# EAGLE board ELEKTRA-PMIC v0.2-35X19 Half frame shield (EAGLE 9.6.2)
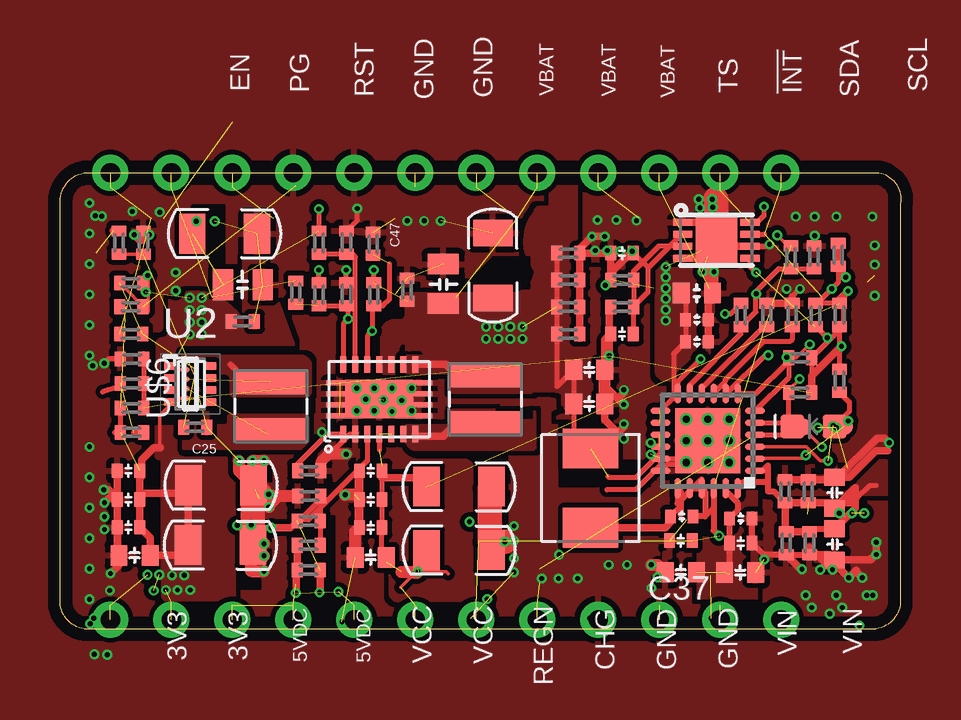
[diagram p0: board, top side]
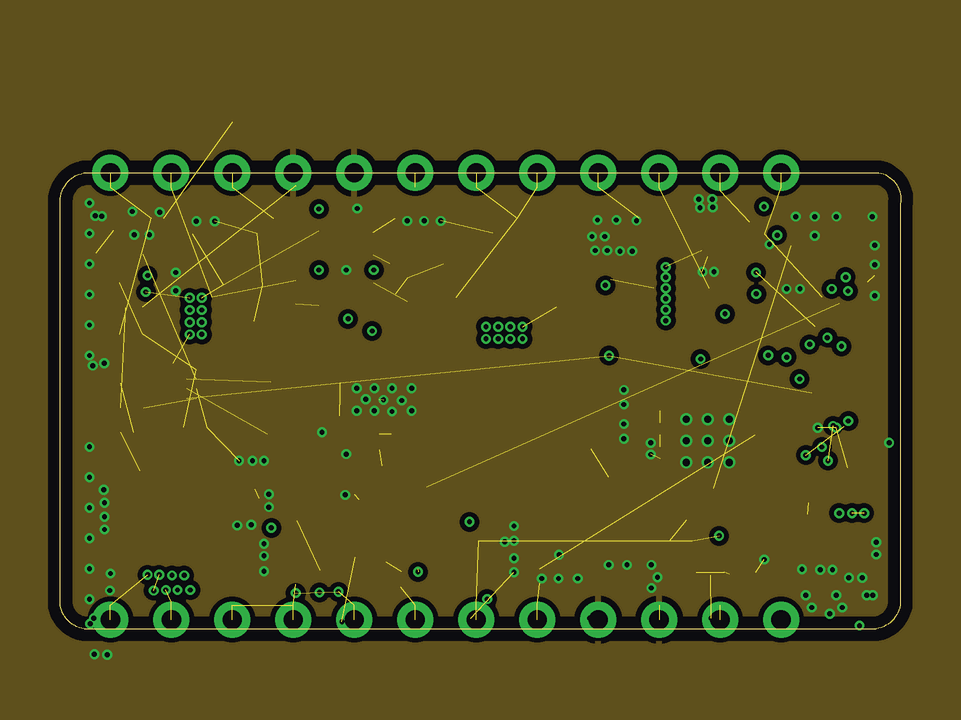
[diagram p1: board, inner layer Route2]
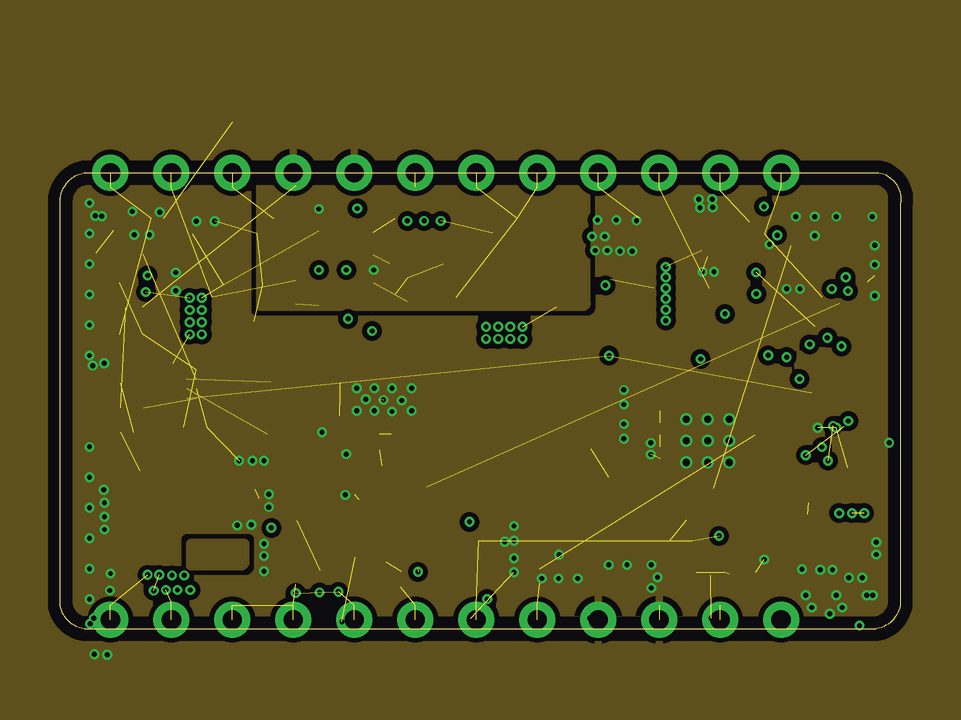
[diagram p2: board, inner layer Route15]
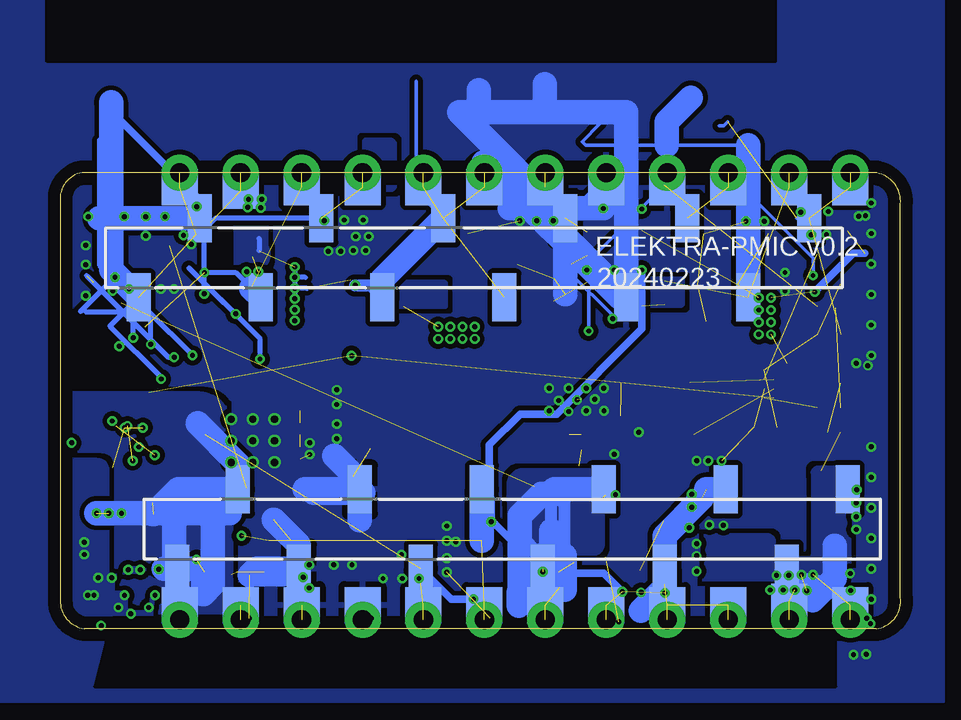
[diagram p3: board, bottom side, seen from below]

Size 35.03 x 19 mm. Coordinates in mm from the lower left corner, seen from the top.
Outline: 1.01,0 34.01,0 arc90 35.01,1.3 35.01,17.7 arc90 34.11,19 1.11,19 arc90 0.01,17.69 0.01,1.3 arc90 1.01,0
Copper layers (1+2*15+16): Top 0.035mm / dielectric 1.5mm / Route2 0.035mm / dielectric 0.15mm / Route15 0.035mm / dielectric 0.2mm / Bottom 0.035mm
Design rules "default *": minimum track width 4mil, minimum drill 8mil, track to track 8mil, track to pad 6mil, pad to pad 6mil, via to via 6mil, smd to smd 6mil, copper to edge 20mil, drill to drill 6mil, minimum pad ring 4mil, minimum via ring 4mil, stop-mask expansion 4mil, vias tented up to drill 16mil, thermal gap 10mil
Net classes: 0 default: width 0.152 mm, drill 0.203 mm, clearance 0.152 mm; 1 power: width 0.254 mm, drill 0.203 mm, clearance 0.203 mm; 3 BAT: drill 0.203 mm, clearance 0.203 mm; 4 3V3: width 0.305 mm, drill 0.203 mm, clearance 0.508 mm; 6 +3V3: width 0.203 mm, drill 0.203 mm, clearance 0.152 mm

## Footprints (pad centres in the part's own frame; a part is rotated, then mirrored left to right if it is on the bottom)
C0402_B = smd 0.457 x 0.61: 1 -0.483,0; 2 0.483,0
C-0402 = smd 0.45 x 0.55: 1 -0.47,0; 2 0.47,0
C0603 = smd 0.7 x 0.85: 1 -0.65,0; 2 0.65,0
C0402 = smd 0.45 x 0.6: 1 -0.47,0; 2 0.47,0
C-0603A = smd 0.7 x 0.85: 1 -0.65,0; 2 0.65,0
C0805 = smd 0.85 x 1.3: 1 -0.8,0; 2 0.85,0
C1206 = smd 1.1 x 1.65: 1 -1.35,0; 2 1.35,0
1X12_SMD_STRAIGHT = smd 1 x 2: 1 13.97,1.65; 2 11.43,-1.65; 3 8.89,1.65; 4 6.35,-1.65; 5 3.81,1.65; 6 1.27,-1.65; 7 -1.27,1.65; 8 -3.81,-1.65; 9 -6.35,1.65; 10 -8.89,-1.65; 11 -11.43,1.65; 12 -13.97,-1.65
LED-0603 = smd 1 x 1: A -0.877,0; C 0.877,0
INDUCTOR-VLS-E = smd 1 x 3: P$1 -1,0; P$2 1,0
INDUCTOR-4040 = smd 1.65 x 2.3: P$1 -1.65,0; P$2 1.65,0
R0402_B = smd 0.457 x 0.61: 1 -0.483,0; 2 0.483,0
TP0.7MM = smd 0.7 x 0.7: P$1 0,0
QFN24 = smd 0.85 x 0.28: 1 -1.975,1.25; 2 -1.975,0.75; 3 -1.975,0.25; 4 -1.975,-0.25; 5 -1.975,-0.75; 6 -1.975,-1.25; 13 1.975,-1.25; 14 1.975,-0.75; 15 1.975,-0.25; 16 1.975,0.25; 17 1.975,0.75; 18 1.975,1.25 | smd 0.28 x 0.85: 7 -1.25,-1.975; 8 -0.75,-1.975; 9 -0.25,-1.975; 10 0.25,-1.975; 11 0.75,-1.975; 12 1.25,-1.975; 19 1.25,1.975; 20 0.75,1.975; 21 0.25,1.975; 22 -0.25,1.975; 23 -0.75,1.975; 24 -1.25,1.975 | smd 2.7 x 2.7: PAD 0,0 | drill 0.3 pad 0.406: PAD@1 -0.9,0.9; PAD@2 0,0.9; PAD@3 0.9,0.9; PAD@4 -0.9,0; PAD@5 0,0; PAD@6 0.9,0; PAD@7 -0.9,-0.9; PAD@8 0,-0.9; PAD@9 0.9,-0.9
SOT538 = smd 0.475 x 0.3: 1 -0.838,0.754; 2 -0.838,0.254; 3 -0.838,-0.246; 4 -0.838,-0.746; 5 0.838,-0.746; 6 0.838,0.254; 7 0.838,-0.246; 8 0.838,0.754
TDFN-8 = smd 0.8 x 0.3: 1 -1.4,0.75; 2 -1.4,0.25; 3 -1.4,-0.25; 4 -1.4,-0.75; 5 1.4,-0.75; 6 1.4,-0.25; 7 1.4,0.25; 8 1.4,0.75 | smd 1.73 x 1.88: EP 0,0
12PIN_2.54 = drill 0.8 pad 1.5: 1 -13.97,0; 2 -11.43,0; 3 -8.89,0; 4 -6.35,0; 5 -3.81,0; 6 -1.27,0; 7 1.27,0; 8 3.81,0; 9 6.35,0; 10 8.89,0; 11 11.43,0; 12 13.97,0 | smd 1.5 x 1.5 bottom: P$1 -13.97,0.6; P$2 -11.43,0.75; P$3 -8.89,0.6; P$4 -6.35,0.6; P$5 -3.81,0.6; P$6 -1.27,0.6; P$7 1.27,0.6; P$8 3.81,0.6; P$9 6.35,0.6; P$10 8.89,0.6; P$11 11.43,0.6; P$12 13.97,0.6
TPS63020 = smd 0.25 x 0.7: 1 -1.5,-1.45; 2 -1,-1.45; 3 -0.5,-1.45; 4 0,-1.45; 5 0.5,-1.45; 6 1,-1.45; 7 1.5,-1.45; 8 1.5,1.45; 9 1,1.45; 10 0.5,1.45; 11 0,1.45; 12 -0.5,1.45; 13 -1,1.45; 14 -1.5,1.45 | smd 1.1 x 0.2: 15 -1.65,0.69; 16 -1.65,0.23; 17 -1.65,-0.23; 18 -1.65,-0.69; 19 1.65,-0.69; 20 1.65,-0.23; 21 1.65,0.23; 22 1.65,0.69 | smd 2.85 x 1.58: 23 0,0
DSBGA = smd 0.23 x 0.23: A1 -0.2,0.6; A2 0.2,0.6; B1 -0.2,0.2; B2 0.2,0.2; C1 -0.2,-0.2; C2 0.2,-0.2; D1 -0.2,-0.6; D2 0.2,-0.6

## Placement (x,y rotation side)
C1  100pF  [C0402_B]  21.18,14.53 180 top
C2  47nF  [C-0402]  25.91,4.67 180 top
C3  10uF  [C0603]  26.54,13.98 0 top
C4  1000pF  [C0402_B]  21.18,13.4 180 top
C5  10nF  [C0402]  23.42,12.28 180 top
C6  1uF  [C0402]  23.42,15.64 180 top
C7  10uF,25V  [C-0603A]  28.34,2.34 0 top
C8  0.1nF  [C0402_B]  21.18,12.28 180 top
C9  0.1nF  [C0402_B]  31.18,5.73 270 top
C10  100pF  [C0402_B]  30.21,5.73 270 top
C11  1000pF  [C0402_B]  30.26,3.56 90 top
C12  22uF 10V  [C0805]  7.6,14.33 0 top
C13  100nF  [C0402_B]  7.62,12.8 180 top
C14  NC  [C0402_B]  3,9.2 180 top
C15  100uF  [C1206]  6.71,5.97 0 top
C16  22uF  [C-0603A]  3.11,3.05 180 top
C17  0.1uF  [C0402]  28.36,3.56 180 top
C18  100pF  [C0402]  2.85,5.37 180 top
C19  1nF  [C0402]  2.85,6.58 180 top
C20  2.2uF  [C0402_B]  31.23,3.56 90 top
C21  10pF  [C0402_B]  21.18,15.64 180 top
C22  100uF 10V  [C1206]  6.86,16.46 0 top
C23  100uF  [C1206]  6.69,3.48 0 top
C24  0.1uF  [C0402]  2.85,4.22 180 top
C25  10nF  [C0402_B]  5.63,8.39 180 top
C26  22uF 10V  [C0805]  15.97,14.34 90 top
C27  100nF  [C0402_B]  14.46,14.11 270 top
C28  NC  [C0402_B]  10.36,3.47 180 top
C29  100uF  [C1206]  16.63,3.27 0 top
C30  22uF  [C-0603A]  12.95,2.97 180 top
C31  1nF  [C0402]  12.95,6.58 180 top
C32  100pF  [C0402]  12.95,5.37 180 top
C33  100uF 10V  [C1206]  18.04,15.13 90 top
C34  100uF  [C1206]  16.63,5.92 0 top
C35  0.1uF  [C0402]  12.95,4.21 180 top
C36  100nF  [C0402_B]  10.39,6.58 180 top
C37  4.7uF  [C0402]  25.87,3.67 180 top
C47  100nF  [C0402_B]  13.05,16.03 270 top
C49  10uF,25V  [C-0603A]  25.87,2.35 180 top
C57  10uF  [C-0603A]  32.28,3.51 270 top
C58  10uF  [C-0603A]  22.05,9.36 0 top
C59  10uF  [C-0603A]  22.05,10.79 0 top
C64  10uF  [C-0603A]  32.28,5.66 90 top
C72  0.1uF  [C-0402]  26.54,11.96 0 top
C73  1000pF  [C-0402]  26.54,12.88 0 top
C74  1000p  [C-0402]  28.36,4.59 180 top
CONN1  CON1  [1X12_SMD_STRAIGHT]  17.78,15.45 180 bottom
CONN2  CON2  [1X12_SMD_STRAIGHT]  16.18,4.15 180 bottom
D5  yellow  [LED-0603]  31.39,8.43 180 top
L1  2.2uH  [INDUCTOR-VLS-E]  8.79,9.27 270 top
L3  2.2uH  [INDUCTOR-VLS-E]  17.72,9.55 270 top
L7  2.2uH  [INDUCTOR-4040]  22.11,5.85 90 top
R1  0R  [R0402_B]  28.37,13.07 270 top
R2  10K  [R0402_B]  31.47,13.07 270 top
R3  10K  [R0402_B]  32.43,15.58 270 top
R4  1.1M  [R0402_B]  10.36,2.44 180 top
R5  180K  [R0402_B]  10.39,5.53 0 top
R6  62K  [R0402_B]  10.36,4.49 180 top
R7  150  [R0402_B]  23.42,13.4 0 top
R8  1M  [R0402_B]  3,8.18 180 top
R9  180K  [R0402_B]  3,11.24 0 top
R10  10K  [R0402_B]  30.51,13.07 270 top
R11  0R  [R0402_B]  32.48,13.07 90 top
R14  1M  [R0402_B]  2.96,14.41 180 top
R16  1M  [R0402_B]  2.46,16.09 270 top
R17  24K  [R0402_B]  3,10.22 180 top
R18  NC  [R0402_B]  3.47,16.09 90 top
R19  1M/NC  [R0402_B]  10.79,13.93 270 top
R20  0R/NC  [R0402_B]  11.93,13.93 90 top
R21  1M  [R0402_B]  13.07,13.93 270 top
R23  1M  [R0402_B]  10.79,16.09 270 top
R24  NC  [R0402_B]  11.93,16.09 90 top
R26  0R  [R0402_B]  9.82,14 90 top
R27  0R  [R0402_B]  2.96,12.28 180 top
R28  0R  [R0402_B]  2.96,13.41 180 top
R30  4K7  [R0402_B]  30.84,9.84 180 top
R33  160R  [R0402_B]  29.45,13.07 90 top
R34  31.2K  [R0402_B]  31.42,15.48 90 top
R35  5.49K  [R0402_B]  30.46,15.48 270 top
R36  4K7  [R0402_B]  30.84,11.29 180 top
R44  1K  [R0402_B]  32.48,10.33 90 top
R54  1K  [R0402_B]  23.42,14.53 0 top
TP1  TP  [TP0.7MM]  30.95,8.4 180 top
TP2  TP  [TP0.7MM]  32.68,8.42 180 top
U1  BQ24195L  [QFN24]  26.99,7.82 180 top
U2  TPS631000DRLR  [SOT538]  5.43,10.19 0 top
U4  MAX1704X  [TDFN-8]  27.35,16.19 0 top
U$1  12PIN_2.54  [12PIN_2.54]  16.07,0.38 0 top
U$3  TPS63020  [TPS63020]  13.3,9.56 0 top
U$4  12PIN_2.54  [12PIN_2.54]  16.07,19 180 top
U$6  TPS631010  [DSBGA]  5.48,10.19 0 top

## Library data of the parts
C1 = Particle; ITEM_NAME: CAP CER 100pF 50V X7R 0402 10%; ITEM_NUMBER: PT-200138
C2 = particle SZ; ITEM_NAME: CAP CER 0.1uF 16V X7R 0402 10%; ITEM_NUMBER: PT-200005
C3 C37 C58 C59 = particle SZ; ITEM_NAME: CAP CER 10uF 6.3V X5R 0603 10% Low ESR<70mohms; ITEM_NUMBER: PT-200209
C4 = Particle; ITEM_NAME: CAP CER 1000PF 50V X7R 0402 10%
C5 = particle SZ; ITEM_NAME: CAP CER 10nF 16V X5R 0402 10%; ITEM_NUMBER: PT-200136
C6 = particle SZ; ITEM_NAME: CAP CER X5R 1uF 0402 10V ±10% ROHS; ITEM_NUMBER: PT-200695
C7 C49 C57 C64 = particle SZ; ITEM_NAME: CAP CER 100PF 50V C0G/NP0 0603 5%; ITEM_NUMBER: PT-200458
C8 C13 C27 = Particle; ITEM_NAME: CAP CER 0.1UF 16V X7R 0402 10%; ITEM_NUMBER: PT-200649
C9 = Particle; ITEM_NAME: CAP CER 0.1UF 25V X7R 0402 20%; ITEM_NUMBER: PT-200690
C10 = Particle; ITEM_NAME: CAP CER 100PF 1% 50V C0G/NP0 0402; ITEM_NUMBER: 120-00051
C11 = Particle; ITEM_NAME: CAP CER 1000PF 50V X7R 0402 10%; ITEM_NUMBER: PT-200631
C12 C26 = particle SZ; ITEM_NAME: CAP CER 0.1UF 16V X7R 0402 10%; ITEM_NUMBER: 120-00060
C14 C25 C28 C36 C47 L1 L3 R7 R33 = Particle
C15 C23 C29 C34 = particle SZ; ITEM_NAME: 100UF 20% 6.3V 1206, Low DCL, ESR 0.5Ohm; ITEM_NUMBER: 120-00011
C16 C30 = particle SZ; ITEM_NAME: CAP CER 22UF 10V X5R 0603 20%; ITEM_NUMBER: 120-00061
C17 = RedBear; ITEM_NAME: CAP CER 0.1UF 25V X7R 0402 20%; ITEM_NUMBER: PT-200690
C18 C32 = particle SZ; ITEM_NAME: 100pF 50V X7R 0402 10%; ITEM_NUMBER: PT-200138
C19 C31 C73 = particle SZ; ITEM_NAME: 1000PF 50V X7R 0402 10%; ITEM_NUMBER: PT-200631
C20 = Particle; ITEM_NAME: CAP CER 2.2UF 25V X7S 0603; ITEM_NUMBER: PT-201241
C21 = Particle; ITEM_NAME: CAP CER 10PF 5% 50V C0G/NP0 0402; ITEM_NUMBER: 120-00038
C22 C33 U2 U$1 U$3 U$4 U$6 = particle SZ
C24 C35 = particle SZ; ITEM_NAME: 0.1UF 16V X7R 0402 10%; ITEM_NUMBER: PT-200649
C72 = particle SZ; ITEM_NAME: CAP CER 0.1UF 16V X7R 0402 10%; ITEM_NUMBER: PT-200649
C74 = particle SZ; ITEM_NAME: CAP CER 1000PF 50V X7R 0402 10%; ITEM_NUMBER: PT-200631
CONN1 CONN2 = particle-studios
D5 = SparkFun-LED; PROD_ID: DIO-00819
L7 = Particle; ITEM_NAME: FIXED IND 1UH 5.8A 26 MOHM SMD 4020; ITEM_NUMBER: 155-00005
R1 R26 = Spark; ITEM_NAME: RES SMD 0R OHM 5% 1/16W 0402; ITEM_NUMBER: PT-200624
R2 R3 R10 = Spark; ITEM_NAME: 10K OHM 5% 1/16W 0402; ITEM_NUMBER: PT-200004
R4-R6 R9 R18-R20 R24 R27 R28 R34 R35 = Spark
R8 R14 R16 R21 R23 = Spark; ITEM_NAME: RES SMD 1M OHM 1% 1/16W 0402; ITEM_NUMBER: PT-201084
R11 = Particle; ITEM_NAME: RES SMD 0R OHM 5% 1/16W 0402; ITEM_NUMBER: PT-200624
R17 = Spark; ITEM_NAME: RES SMD 24K OHM 1% 1/16W 0402; ITEM_NUMBER: PT-201025
R30 R36 = Particle; ITEM_NAME: RES SMD 4K7 OHM 5% 1/16W 0402; ITEM_NUMBER: PT-200230
R44 R54 = Particle; ITEM_NAME: RES SMD 1K OHM 5% 1/16W 0402; ITEM_NUMBER: PT-200002
TP1 TP2 = Asset Tracker SoM v1.0b
U1 = electron; ITEM_NAME: IC BATT CHG LI-ION 1CELL 24VQFN 2.5A CHG CURRENT; ITEM_NUMBER: 150-00013
U4 = SparkFun-PowerIC; ITEM_NAME: IC 2-WIRE FG MODEL GAUGE LO BATT; ITEM_NUMBER: PT-200141

## Nets
3V3: C14.2 C15.1 C16.1 C18.1 C19.1 C23.1 C24.1 CONN2.11 CONN2.12 R2.1 R3.1 R7.1 R8.2 R28.2 R30.1 R36.1 U$1.1 U$1.2 U$1.P$1 U$1.P$2 U$6.D1
5VDC: CONN2.9 CONN2.10 U$1.3 U$1.4 U$1.P$3 U$1.P$4
!CE: R10.2 U1.9
!FUEL-INT: CONN1.3 R2.2 U1.7 U4.5 U$4.3 U$4.P$3
!RST: CONN1.10 U$4.10 U$4.P$10
BTST: C2.1 U1.21
CHG: CONN2.5 D5.C U1.4 U$1.8 U$1.P$8
ENABLE: CONN1.12 R27.2 U$4.12 U$4.P$12
GND: C1.1 C3.2 C4.1 C5.2 C6.2 C7.2 C8.1 C9.1 C10.1 C11.1 C12.2 C13.1 C15.2 C16.2 C17.1 C18.2 C19.2 C20.1 C21.1 C22.2 C23.2 C24.2 C25.1 C26.2 C27.1 C29.2 C30.2 C31.2 C32.2 C33.2 C34.2 C35.2 C36.1 C37.2 C47.1 C49.2 C57.2 C58.2 C59.2 C64.2 C72.2 C73.2 C74.1 CONN1.8 CONN1.9 CONN2.3 CONN2.4 R5.1 R9.1 R10.1 R18.2 R20.2 R24.2 R33.2 R34.2 U1.17 U1.18 U1.PAD U1.PAD@1 U1.PAD@2 U1.PAD@3 U1.PAD@4 U1.PAD@5 U1.PAD@6 U1.PAD@7 U1.PAD@8 U1.PAD@9 U4.1 U4.4 U4.6 U4.EP U$1.9 U$1.10 U$1.P$9 U$1.P$10 U$3.2 U$3.15 U$3.16 U$3.17 U$3.18 U$3.19 U$3.20 U$3.21 U$3.22 U$3.23 U$4.8 U$4.9 U$4.P$8 U$4.P$9 U$6.C2
ILIM: R33.1 U1.10
N$1: R1.1 U1.12
N$2: R11.1 R44.2
N$3: D5.A R44.1
N$4: TP1.P$1 U1.3
N$5: C14.1 R9.2 R17.1 U$6.D2
N$6: C28.1 R5.2 R6.1 U$3.3
N$7: TP2.P$1 U1.2
N$8: R8.1 R17.2
N$9: R4.1 R6.2
N$11: L3.P$1 U$3.8 U$3.9
N$12: L1.P$1 U$6.B1
N$14: C25.2 R14.2 R27.1 U$6.A2
N$15: R16.2 R18.1 U$6.B2
N$16: L3.P$2 U$3.6 U$3.7
N$17: L1.P$2 U$6.C1
N$19: C36.2 U$3.1
N$20: R19.2 R20.1 R26.1 U$3.14
N$21: C47.2 R21.2 R28.1 U$3.12
N$22: R23.2 R24.1 U$3.13
N$48: C5.1 R7.2 U4.3
N$49: C6.1 R54.2 U4.2
OTG: R3.2 U1.8
PG: CONN1.11 R26.2 U$4.11 U$4.P$11
PMID: C7.1 C17.2 C49.1 C74.2 U1.23
REGN: C37.1 CONN2.6 R35.1 U1.22 U$1.7 U$1.P$7
SCL: CONN1.1 R30.2 U1.5 U4.7 U$4.1 U$4.P$1
SDA: CONN1.2 R36.2 U1.6 U4.8 U$4.2 U$4.P$2
SW1: C2.2 L7.P$1 U1.19 U1.20
TS: CONN1.4 R1.2 R34.1 R35.2 U1.11 U$4.4 U$4.P$4
VBAT: C3.1 C72.1 C73.1 CONN1.5 CONN1.6 CONN1.7 R54.1 U1.13 U1.14 U$4.5 U$4.6 U$4.7 U$4.P$5 U$4.P$6 U$4.P$7
VCC: C28.2 C29.1 C30.1 C31.1 C32.1 C34.1 C35.1 CONN2.7 CONN2.8 R4.2 R11.2 R19.1 U$1.5 U$1.6 U$1.P$5 U$1.P$6 U$3.4 U$3.5
VIN: C9.2 C10.2 C11.2 C20.2 C57.1 C64.1 CONN2.1 CONN2.2 U1.1 U1.24 U$1.11 U$1.12 U$1.P$11 U$1.P$12
VSYS: C1.2 C4.2 C8.2 C12.1 C13.2 C21.2 C22.1 C26.1 C27.2 C33.1 C58.1 C59.1 L7.P$2 R14.1 R16.1 R21.1 R23.1 U1.15 U1.16 U$3.10 U$3.11 U$6.A1

## Tracks (layer width: path | path; a pad name or v marks a point on that pad's centre or on a via)
3.9V
  pour Top (no thermals): 13.38,8.47 14.04,8.47 arc-90 14.12,8.39 14.12,7.83 arc90 14.9,7.04 16.78,7.04 arc-90 17.24,6.59 17.24,1.26 arc-90 17.19,1.2 arc-90 17.14,1.15 14.09,1.15 arc-90 13.76,1.48 13.76,6.89 13.58,7.07 arc90 13.58,7.09 arc-90 13.38,7.3
3V3  (via drill 0.2 pad 0.41)  (9 unrouted)
  Top 0.152: 2.73,13.36 R28.2 | U$6.D1 4.85,9.59 4.16,8.9 4.16,7.55 4.17,7.54
  Top 0.203: C14.2 R8.2 2.26,8.18 | R30.1 R36.1 32.66,12.62 32.66,13.39 32.5,13.55 R2.1 31.55,13.55 v32.15,14.15 32.44,14.44 32.44,16.08 R3.1
  Top 0.305: 3.32,5.65 C18.1 C24.1 3.76,3.79 C16.1 4.9,3.05 C23.1 5.33,5.95 C15.1 5.03,5.65 3.32,5.65 | 3.32,5.65 3.32,6.28 | 3.32,6.28 C19.1 | 3.32,6.28 3.4,6.36 3.4,7.04 3.9,7.54 4.17,7.54 | R7.1 22.88,13.34 v22.88,11.37 | v32.56,11.76 31.33,10.53 R30.1
  Bottom 1.016: CONN2.11 4.75,1.82 3.66,1.82 3.66,1.19 2.75,2.1 2.75,3.45
  other vias: 5.43,1.61 4.9,1.61 4.41,1.61 3.9,1.59 4.13,2.24 4.67,2.22 5.17,2.22 3.65,2.24
  pour Top (no thermals): 4.06,8.44 4.77,8.44 arc-90 4.82,8.39 4.82,7.47 arc90 5.17,7.12 6.8,7.12 arc-90 7.26,6.66 7.26,1.18 4.46,1.18 arc-90 4.29,1.36 4.29,2.24 arc-90 4.26,2.27 4.26,6.94 arc90 4.11,7.09 arc-90 4.01,7.2 4.01,8.39 arc-90
  pour Route15: 5.45,2.49 7.55,2.49 arc90 7.83,2.77 7.83,3.53 arc90 7.68,3.68 5.47,3.68 arc90 5.29,3.5 5.29,2.64 arc90
  pour Bottom (no thermals): 2.47,6.73 3.44,6.73 arc-90 3.69,6.48 3.69,3.1 arc90 3.85,2.95 4.99,2.95 arc90 5.24,3.2 5.24,3.61 arc-90 5.55,3.91 8.27,3.91 arc-90 8.7,3.48 8.7,2.39 arc-90 8.34,2.03 2.25,2.03 arc-90 2.1,2.18 2.1,6.35 arc-90
5VDC  (5 unrouted)
  Bottom 1.016: CONN2.9 9.83,1.84 | CONN2.9 9.83,1.73 10.82,0.74 | CONN2.9 9.83,3.87 8.28,5.42 | CONN2.10 8.11,5.8
!CE
  Top 0.203: U1.9 27.72,10.28 27.72,10.38 29.32,11.97 30.44,11.97 30.51,12.04 R10.2
!FUEL-INT  (via drill 0.2 pad 0.41)  (4 unrouted)
  Top 0.203: U1.7 29.02,9.8 30.27,11.05 v30.27,11.31 | R2.2 31.51,12.58 v31.98,12.12 | U4.5 28.75,15.1 v29,14.84
  Bottom 0.203: v31.98,12.12 31.98,12.76 33.64,14.43 | v30.27,11.31 30.52,11.31 33.92,14.7 | v29,14.84 27.71,14.84 CONN1.3
  Bottom 1.016: CONN1.3 27.05,14.18
!RST  (2 unrouted)
BTST
  Top 0.254: U1.21 26.88,5.71 26.88,4.68 | C2.1 26.87,4.67 27.24,5.04
CHG  (via drill 0.2 pad 0.41)  (3 unrouted)
  Top 0.152: v31.75,7.57 30.89,8.43 D5.C
  Top 0.203: U1.4 30.16,8.07 D5.C
  Bottom 0.305: CONN2.5 18.72,1.23 v17.8,1.23
  Bottom 1.016: 19.99,1.88 CONN2.5
ENABLE  (4 unrouted)
  Bottom 0.152: 7.55,20.95 7.36,20.95 7.2,21.12 | 4.32,17.1 CONN1.12
GND  (via drill 0.2 pad 0.41)  (24 unrouted)
  Top 0.152: C10.1 | C74.1 28.83,3.64 29.34,3.13 v29.34,2.88 | U$3.21 13.76,9.79 13.53,9.56 U$3.23 13.45,9.56 14.14,10.25 U$3.22 | U$3.17 12.39,9.33 12.44,9.38 12.44,9.94 v12.36,10.02 13.05,10.02 13.27,9.79 | U$3.20 14.42,9.33 v14.24,9.51 | U$3.19 14.01,8.87 v13.83,9.05
  Top 0.203: R20.2 v11.93,14.94 | U$3.2 12.08,8.11 10.87,6.9 | 10.87,6.95 10.87,6.9 | 10.87,6.9 C36.1 | 12.45,4.19 C35.2 C32.2 12.48,5.59 | 12.48,6.46 C31.2 | 21.67,14.5 C1.1 | 27.19,13.75 C3.2 | U1.17 26.49,7.07 26.24,6.82 25.26,6.82 U1.18 | 30.51,13.83 v30.83,14.15 | R34.2 31.42,16.27 31.45,16.29 v31.45,16.37 | R24.2 12.39,17.02 v12.39,17.51 | v1.85,11.06 2.03,11.24 R9.1 | U4.6 29.56,15.94 v29.56,16.01 | 7.96,3.41 C23.2
  Top 0.254: C74.1 C17.1 29.32,3.07 C11.1 C20.1
  Top 0.305: 32.83,6.71 32.33,6.21 | 32.33,6.21 32.28,6.15 C64.2 | 32.33,6.21 C9.1 C10.1 | 25.09,2.22 C49.2 | C19.2 C18.2 | C18.2 C24.2 2.38,3.13 C16.2 2.46,2.65 v2.11,2.3 | C5.2 22.7,12.03 C59.2 22.7,10.13 23.25,9.59 | C57.2 32.06,3.07 C20.1 31.23,3.4 31.93,2.7 | 34.49,7.41 33.99,7.41 32.89,6.31 C64.2 | C64.2 32.41,6.31 34.04,7.94 34.34,7.94 v34.54,7.74 | C57.2 33.73,2.86 | v34.01,3.09 33.96,3.09 33.73,2.86 | 33.73,2.86 33.79,2.86 v34.01,3.08 v34.01,3.6 | C57.2 32.28,2.71 v32.87,2.12 33.18,2.43 33.18,2.37 v33.43,2.12 | R18.2 3.47,16.29 | v3.09,16.42 3.35,16.16 3.47,16.29 | 3.47,16.29 3.6,16.42 v3.73,16.42 | C18.2 2.31,5.45 2.05,5.45 v1.85,5.25 | C18.2 2.38,5.43 2.03,5.78 v1.83,5.78 | 31.93,2.7 v31.68,2.45 | 31.93,2.7 v32.18,2.45 v32.19,2.45 | v30.92,2.48 30.86,2.48 C11.1 | v23.84,15.73 23.55,15.44 | 23.55,15.44 22.95,14.84 C6.2 C21.1 | 23.55,15.44 23.34,15.65 v23.34,15.73 | C21.1 21.67,15.84 v22.17,16.34 v22.7,16.34 | C8.1 C4.1 21.67,14.5 | C1.1 C21.1 | C17.1 28.83,3.64 | 23.25,9.59 v23.5,9.34 | 23.25,9.59 23.5,9.84 v23.5,9.95 | C58.2 22.7,8.71 23.25,8.16 | 23.25,8.16 v23.5,7.91 | 23.25,8.16 23.5,8.41 v23.5,8.52 | C72.2 C73.2 27.01,13.57 27.19,13.75 | C3.2 27.19,14.45 v26.77,14.87 | 30.51,13.83 R10.1 R33.2 | C31.2 12.48,5.59 | U4.6 27.6,15.94 U4.EP | U4.4 26.93,15.44 27,15.5 | U4.1 27.21,16.94 27.35,16.8
  Top 0.381: C35.2 12.48,5.59 12.48,6.46
  Top 0.457: v11.93,7.27 11.19,7.27 10.87,6.95
  Top 0.508: C34.2 17.98,5.21 | v24.64,2.65 24.89,2.65 25.2,2.35 C49.2 25.11,2.35 | 12.28,5.57 v11.88,5.57 | C30.2 12.3,4.03 12.45,4.19 | R5.1 8.78,5.53 | 8.78,5.53 8.93,5.37 8.79,5.24 C15.2 | 8.78,5.53 v8.7,5.6 8.33,5.97 C15.2 | 8.7,5.15 v8.7,5.06 | C15.2 7.46,6.57 v7.46,6.99 | C15.2 8.06,6.95 v8.02,6.99 v8.5,6.99 | v8.5,3.03 8.49,3.03 C23.2 8.09,3.54 v8.5,3.54 | v8.5,2.4 7.96,2.4 7.96,3.41 | C58.2 C59.2 | U4.EP 27.19,16.02 C3.2
  Top 0.635: 17.98,5.21 C29.2
  Top 1.016: v18.53,3.62 17.9,3.62 17.9,5.84 C34.2 | C15.2 8.03,5.95 C23.2 | U4.EP 27.35,16.8 27.35,17.9 27.33,17.92
  Bottom 1.016: 14.82,22.68 14.82,21.51 | CONN1.9 11.43,21.51 14.82,21.51 | 22.53,4.53 CONN2.4 | CONN2.4 24.84,5.8 | 22.43,5.62 22.39,5.66 24.45,5.66 | CONN2.4 22.53,6.14 23.61,7.21 | CONN1.8 13.97,13.94 | CONN1.8 18.38,21.51 14.82,21.51 | CONN1.8 14.03,17.04 | 17.45,21.54 17.59,21.54 17.59,22.43 | 15.81,17.98 16.28,17.51 v12.39,17.51 | CONN1.9 15.71,18.08 | 17.36,19.43 11.73,13.8 CONN1.9 | 25.07,2.21 CONN2.3 | 25.78,2.33 25.71,2.26 26.96,2.26 | CONN2.3 26.85,2.5 27.11,2.23 | CONN2.3 25.07,3.5 26.12,4.54
  other vias: 13.1,10.02 13.83,10.02 14.65,10.02 12.74,9.56 13.48,9.53 12.36,9.08 13.1,9.08 14.65,9.08 1.23,17.73 1.47,17.21 1.75,17.18 3.02,17.38 4.16,17.36 1.23,16.46 1.23,15.19 1.23,13.92 1.23,12.65 1.23,11.38 1.23,7.57 1.23,6.3 1.23,5.03 1.23,3.76 1.23,2.49 1.23,1.22 31.07,1.39 32.34,1.39 33.61,1.39 1.26,0.21 1.43,-1.07 1.97,-1.09 31.32,0.88 32.07,0.62 32.59,0.88 33.86,1.39 33.31,0.13 22.4,17.03 1.41,0.43 11.75,0.28 17.11,0.43 22.06,0.43 27.14,0.43 4.82,14.08 4.82,14.84 7.97,4.33 5.68,16.98 6.44,16.98 1.36,10.96 24.62,7.74 24.62,7.26 24.9,2.14 24.64,1.69 22.86,2.65 32.34,8.37 20.8,3.08 23.62,2.65 31.58,8.37 7.38,4.3 10.92,8.19 18.91,4.27 18.91,3.67 18.91,2.93 18.91,2.34 2.08,1.59 22.8,15.76 22.29,15.76 23.18,17.03 24.02,17 27.25,14.87 30.27,14.16 26.67,17.53 27.2,17.56 26.62,17.89 27.18,17.89 1.85,4.66 1.85,4.13 20.07,2.09 20.77,2.09 21.57,2.09 14.47,16.99 15.17,16.99 15.87,16.99 30.65,17.17 31.45,17.17 32.35,17.17 33.85,17.17 33.95,15.97 33.95,15.17 33.95,13.87
  pour Bottom (rank 3): -1.79,27.84 47.33,27.84 47.33,-3.05 -1.79,-3.05
  pour Top (rank 3): -4.79,30.07 42.48,30.07 42.48,-5.31 -4.79,-5.31
  pour Route2: -3.82,29.13 44.18,29.13 44.18,-4.73 -3.82,-4.73
  cutout Top: 20.82,7 24.56,7 24.56,5.93 20.82,5.93
  cutout Top: 19.65,9.25 19.65,8.8 16.35,8.8
  cutout Top: 6.95,9.58 10.58,9.58 10.58,9.02 6.95,9.02
  cutout Top: 7.38,7.17 8.35,7.17 8.35,1.66 7.38,1.66
  cutout Top: 17.37,7.12 18.64,7.12 18.64,2.04 17.37,2.04
  cutout Bottom: 20.61,18.44 20.91,18.44 20.91,18.11 20.61,18.11
  cutout Top: 15.59,14.54 17.09,14.54 18.03,15.48 19.55,15.48 19.55,14.18 15.59,14.18
  pour Route15 (rank 3): -2.99,28.47 45.73,28.47 45.73,-3.94 -2.99,-3.94
  cutout Top: 6.24,13.77 6.24,15.27 5.48,16.03 5.48,17.58 5.53,17.64 6.85,17.64 6.85,13.8 6.83,13.77
  cutout Top: 10.43,14.18 10.43,13.75 11.09,13.75 11.09,14.18
  cutout Top: 10.89,4.68 10.89,1.02 11.42,1.02 11.42,4.68
  cutout Bottom: 2.7,0.46 32.83,0.46 32.85,0.43 33.59,-2.41 32.85,-2.41 2.7,-2.41
  cutout Bottom: 5.22,26.57 5.22,23.62 35.57,23.62 35.57,26.57
ILIM
  Top 0.203: U1.10 26.74,10.01 29.3,12.57 29.45,12.57 R33.1
N$1  (via drill 0.2 pad 0.41)
  Top 0.203: v26.69,11.23 25.74,10.28 U1.12 | R1.1 27.94,13.11 v27.71,13.11
  Bottom 0.203: 28.97,14.35 27.73,13.11 v27.71,13.11 | 29.65,15.04 26.69,12.08 v26.69,11.23
N$2
  Top 0.203: R11.1 R44.2
N$3
  Top 0.203: R44.1 32.89,9.44 32.89,9.05 D5.A
N$4  (via drill 0.2 pad 0.41)  (1 unrouted)
  Top 0.152: TP1.P$1 32.16,8.4 v32.21,8.45 | v32,7 31.68,7 31.1,7.57 U1.3
N$5  (1 unrouted)
  Top 0.203: 3.48,11.46 R9.2 R17.1 C14.1
N$6
  Top 0.203: U$3.3 12.8,6.99 10.35,4.54 10.02,4.54 10.87,5.38 R5.2 10.84,5.5 R6.1 C28.1
N$7  (via drill 0.2 pad 0.41)  (1 unrouted)
  Top 0.152: U1.2 28.99,7.1 30.95,7.1 v31.07,7.22 | v32.85,8.65 32.68,8.48 TP2.P$1
N$8  (1 unrouted)
  Top 0.203: R8.1 3.06,8.18 | R17.2 2.36,10.07 1.77,9.87
N$9  (via drill 0.2 pad 0.41)  (1 unrouted)
  Top 0.203: R6.2 9.58,4.2
  Top 0.305: 9.58,4.2 v8.81,4.2 | R4.1 10.84,1.54 v10.81,1.51
N$11
  Top 0.305: L3.P$1 16.53,10.55 16.07,11.01 U$3.8
  pour Top (no thermals): 14.5,11.36 19.58,11.36 arc-90 19.73,11.21 19.73,9.99 arc-90 19.58,9.84 16.43,9.84 arc-90 16.27,9.99 16.27,10.55 arc90 16.17,10.65 14.5,10.65 arc-90 14.45,10.7 14.45,11.31 arc-90
N$12  (1 unrouted)
  Top 0.254: L1.P$1 7.84,10.27 7.1,11.01
  pour Top (no thermals): 5.1,11.36 10.03,11.36 arc-90 10.43,10.95 10.43,9.89 arc-90 10.23,9.68 7.23,9.68 arc-90 7.13,9.79 7.13,10.4 arc90 6.88,10.65 5.1,10.65
N$14  (via drill 0.2)  (3 unrouted)
  Top 0.152: R14.2 3.67,13.2 3.67,14.73 v3.65,14.71
  Bottom 0.152: 7.6,19.02 6.92,19.02 6.92,18.69 3.65,15.43 v3.65,14.71
N$15  (1 unrouted)
  Top 0.152: R16.2 R18.1
N$16
  Top 0.305: L3.P$2 16.51,8.55 15.97,8.01 14.9,8.01 U$3.7
  pour Top (no thermals): 14.45,8.47 16.07,8.47 arc90 16.33,8.72 16.33,9.02 arc-90 16.43,9.13 19.63,9.13 arc-90 19.78,8.97 19.78,7.55 arc-90 19.68,7.45 14.85,7.45 arc-90 14.45,7.86
N$17  (1 unrouted)
  Top 0.305: L1.P$2 8.63,8.11
  pour Top (no thermals): 5.15,8.47 6.88,8.47 arc90 7.03,8.62 7.03,8.82 arc-90 7.13,8.92 10.13,8.92 arc-90 10.33,8.72 10.33,7.65 arc-90 10.18,7.5 5.15,7.5
N$19
  Top 0.203: U$3.1 11.14,8.11 9.9,6.87 C36.2
N$20  (via drill 0.2)  (1 unrouted)
  Top 0.203: R19.2 R20.1 12,13.37 v12,12.91 11.8,12.71 U$3.14
  Bottom 0.152: 11.85,18.46 12.64,18.46 13.8,17.3 13.8,14.86 12,13.06 v12,12.91
N$21  (via drill 0.2)  (2 unrouted)
  Top 0.203: U$3.12 12.8,12.2 v13,12.4 13,13.44 R21.2 13.45,13.44 13.73,13.72 13.73,15.2
  Bottom 0.152: 9.84,18.46 12.86,15.44 12.86,14.24 13,14.1 v13,12.4
N$22
  Top 0.203: R23.2 R24.1 12.19,15.6 12.3,15.49 U$3.13
N$48
  Top 0.203: U4.3 24.95,15.94 23.9,14.89 R7.2 23.9,12.28 C5.1
N$49
  Top 0.203: R54.2 23.9,13.43 24.5,14.03 24.5,15.03 | 24.5,15.03 C6.1 | U4.2 25.91,16.44 24.5,15.03
OTG  (via drill 0.2 pad 0.41)
  Top 0.203: R3.2 32.43,14.95 v32.74,14.64 | U1.8 27.79,9.8 29.38,11.39 v29.51,11.39
  Bottom 0.203: 33.97,13.21 31.32,13.21 v29.51,11.39 | v32.74,14.64 34.17,13.21
PG  (3 unrouted)
  Bottom 0.152: 6.35,20.14 9.74,20.14 13.13,20.14 13.28,20.29 12.53,21.03
  Bottom 1.016: CONN1.11 6.35,20.14 | 9.74,20.14 9.74,21.13 8.74,22.13
PMID  (2 unrouted)
  Top 0.254: U1.23 27.74,5.75 28.24,5.25 28.24,4.94 C74.2 C17.2 27.89,2.26
  Top 0.305: C49.1 26.39,2.22
  pour Top (no thermals): 28.4,7.79 28.55,7.79 28.55,6.97 arc90 28.83,6.69 arc-90 29.01,6.51 29.01,1.26 26.6,1.26 26.6,3.67 arc-90 26.73,3.79 27.87,3.79 arc90 28.4,4.33
REGN  (via drill 0.2 pad 0.41)  (5 unrouted)
  Top 0.152: R35.1 30.31,15.96 v29.88,16.39
  Top 0.254: v27.46,3.87 27.24,4.09 U1.22
  Bottom 0.203: v29.88,16.39 29.88,16.34
  Bottom 0.305: CONN2.6 17.06,5.41 v17.06,4.45
  Bottom 1.016: 17.45,3.66 CONN2.6
SCL  (via drill 0.2 pad 0.41)  (3 unrouted)
  Top 0.152: R30.2 30.36,9.94 v30.81,10.4
  Top 0.203: U1.5 30.1,8.57 30.36,8.83 R30.2 | U4.7 29.36,16.44
  Bottom 0.203: v30.81,10.4 30.81,10.47 32.95,12.6 CONN1.1
  Bottom 1.016: 32.9,21.93 32.9,14.95 CONN1.1
SDA  (via drill 0.2 pad 0.41)  (2 unrouted)
  Top 0.152: R36.2 30.68,11.29 v31.24,11.84
  Top 0.203: R36.2 30.36,10.46 U1.6 | U4.8 29.05,16.94 29.33,17.22 v29.33,17.58
  Bottom 0.203: v31.24,11.84 31.24,13 33.39,15.15 33.39,17.1 33.39,20.33 32.6,21.12 32.6,21.59
  Bottom 0.305: v29.33,17.58 29.33,17.99 32.6,21.26 32.6,21.59
  Bottom 1.016: 33.39,17.1 CONN1.2
SW1
  Top 0.254: L7.P$1 23.99,4.2 | C2.2 25.86,5.1 25.86,5.31 | 25.86,4.75 25.86,5.73 U1.19 25.74,5.21 26.74,6.21 | U1.20 26.62,5.85
  Top 0.305: C2.2 25.44,4.43 25.21,4.2 L7.P$1
TS  (via drill 0.2 pad 0.41)  (2 unrouted)
  Top 0.203: U1.11 26.24,10.15 28.37,12.28 R1.2 28.99,13.2 28.99,13.93 | R34.1 R35.2 29.95,15 28.99,14.04 28.99,13.93 | 28.99,13.93 v29.01,13.95
  Bottom 0.203: v29.01,13.95 29.01,16.66 28.57,17.1 CONN1.4
VBAT  (via drill 0.2 pad 0.41)  (10 unrouted)
  Top 0.203: C3.1 26.07,13.8 C73.1 C72.1 25.57,11.46 25.57,9.63 U1.13
  Top 0.305: v22.73,14.31 R54.1
  Bottom 0.152: CONN1.6 20.18,18.23 20.18,22.81
  Bottom 0.203: 24.8,14.64 v25.24,14.64 | 26.73,16.25 26.73,15.75 | 24.74,14.18 v25.24,14.18 | v25.24,15.07 v25.24,13.75
  Bottom 0.508: v22.73,14.31 22.1,14.31 CONN1.5
  Bottom 1.016: CONN1.5 21.59,14.56 CONN1.6
  other vias: 25.24,13.29 25.24,12.83
  pour Top (no thermals): 25.47,16.01 26.44,16.01 26.44,10.42 arc-90 26.36,10.35 25.27,10.35 arc-90 24.85,10.77 24.85,15.38 arc-90
  pour Bottom (no thermals): 24.57,19.3 26.99,19.3 arc-90 27.75,18.54 27.75,15.24 arc-90 27.49,14.98 26.66,14.98 arc-90 26.4,15.95 26.4,16.97 arc90 26.1,17.27 24.57,17.27 arc-90 24.45,17.4 24.45,19.18 arc-90
VCC  (via drill 0.2 pad 0.41)  (10 unrouted)
  Top 0.152: 16.17,2.29 16.1,2.37 v14.92,2.37 14.86,2.31 | 14.78,2.31 14.2,1.73
  Top 0.203: R19.1 v10.79,14.94 | U$3.4 13.3,7.45 | 13.42,6.78 C31.1 13.42,6.28 C32.1 C35.1 13.42,3.15 C30.1 13.6,2.85 13.6,2.78
  Top 0.305: R11.2 32.48,13.71 v32.83,14.07 | v11.61,1.53 v11.6,1.54 | C34.1 15.28,6.28 13.42,6.28 | 13.64,2.9 13.6,2.85 | C28.2 R4.2 9.85,2.41 9.85,1.51 v9.82,1.48
  Top 0.508: C29.1 15.28,2.73 14.86,2.31 14.78,2.31 | 14.24,2.37 v14.92,2.37
  Bottom 0.152: 15.9,1.95 15.9,1.52
  Bottom 0.203: CONN2.7 15.31,2.89 15.76,2.89
  Bottom 0.305: 13.82,2.3 14.56,3.05 | 13.82,2.3 13.82,2.64 14.5,3.32 | v11.6,1.54 12.37,2.3 13.82,2.3 | v10.79,14.94 10.79,12.49 14.34,8.94 15.86,8.94 17.14,7.65 17.14,4.6 v14.92,2.37
  Bottom 0.508: 14.56,4.09 14.56,5.32 14.26,5.62 | 14,1.62 14,5.37 14.23,5.6 14.26,5.62 | 14.26,5.62 14.43,5.8
  Bottom 0.762: 15.9,1.95 15.36,2.5 CONN2.7 14.91,1.95
  Bottom 1.016: 14,1.62 14,3.05 14.56,3.05 | 14.56,3.05 15.37,3.05 15.85,3.53 15.85,3.44 CONN2.7 15.87,1.54 | 14.91,1.95 15.87,0.98 | 15.9,1.52 15.9,0.96 15.87,0.98 | 15.87,3.55 15.87,4.7 14.95,5.62 14.26,5.62 | 15.87,3.55 15.87,1.54 | 14.43,5.8 CONN2.8 | 15.87,1.54 15.87,0.98 | 14.56,3.05 14.56,4.09 | 15.87,3.55
  pour Bottom (no thermals): 12.38,6.63 15.73,6.63 arc-90 16.37,5.99 16.33,3.1 12.79,3.11 arc-90 12.38,3.52
VIN  (via drill 0.2 pad 0.41)  (3 unrouted)
  Top 0.203: 33.99,5.96 33.74,5.96 33.23,5.45 32.72,5.45 C64.1
  Top 0.254: U1.24 28.49,6.1 29.49,6.1 | C10.2 29.74,5.72 29.49,5.72 29.49,6.1 | U1.1 29.27,6.57 29.49,6.79 29.49,6.1 | C20.2 31.35,4.16 C57.1
  Top 0.305: 33.14,5.25 C9.2 C10.2 30.21,4.09 C11.2 C20.2 | C64.1 33.14,5.87 33.14,5.25 | C57.1 33.14,5.02 33.14,5.25
  Bottom 1.016: CONN2.1 29.06,2.5 29.06,1.44 28.66,1.84 28.66,4.75 CONN2.2 | 30.7,2.5 CONN2.1 | 30.27,5.62 30.27,2.62 CONN2.1 | CONN2.2 30.1,5.8 31.14,4.76 | CONN2.2 27.61,6.87 29.3,8.56 | 27.94,4.81 v33.51,4.81
  other vias: 33,4.81 32.47,4.81
  pour Top (no thermals): 29.37,8.2 30.13,8.2 arc-90 30.23,8.1 30.23,7.49 arc90 30.36,7.36 34.26,7.36 arc-90 34.75,6.88 34.75,5.58 30.51,5.58 arc-90 30.41,5.68 30.41,6.83 arc90 30.21,7.03 29.01,7.03 arc-90 28.88,7.16 28.88,7.74 29.34,7.74 arc90 29.37,7.77
  pour Bottom (no thermals): 36.69,9.85 29.35,9.85 arc90 27.87,8.38 27.87,1.22 arc90 28.46,0.63 31.61,0.63 arc90 32.7,1.73 32.7,6.78 arc-90 33.28,7.36 36.74,7.36 arc90 37.63,8.25 37.63,8.51 37.63,8.91 arc90
VSYS  (via drill 0.2 pad 0.41)  (10 unrouted)
  Top 0.152: 4.72,11.06 4.99,10.79 U$6.A1
  Top 0.203: R21.1 v13.07,14.94 | v10.79,17.48 R23.1 | C21.2 C1.2 C4.2 C8.2 20.7,10.08 C59.1 C58.1 21.4,8.21 L7.P$2 | U1.15 25.01,7.32 23.99,6.29 22.88,6.29 22.84,6.34 | U1.16 25.01,6.82 23.99,5.79 22.8,5.79 22.78,5.78
  Top 0.305: R14.1 3.57,14.32 v3.57,14.03 | R16.1 2.23,16.57
  Bottom 0.203: v17.75,12.58 17.7,12.53
  Bottom 0.305: 1.49,15.63 1.97,15.63 v3.57,14.03
  other vias: 5.4,12.26 5.4,12.77 5.4,13.28 5.4,13.78 5.91,12.26 5.91,12.77 5.91,13.28 5.91,13.78 18.26,12.58 18.76,12.58 19.27,12.58 17.75,12.07 18.26,12.07 18.76,12.07 19.27,12.07
  pour Top (no thermals): 26.49,10.03 26.49,9.62 arc-90 26.18,9.32 20.94,9.32 20.94,13.74 arc-90 20.44,14.24 20.44,19.48 arc-90 20.89,19.94 21.5,19.94 21.5,15.16 arc90 21.66,15.01 22.42,15.01 arc-90 22.67,14.75 22.67,11.91 arc90 23.03,11.55 24.55,11.55 arc-90 24.7,11.4 24.7,10.18 arc90 24.86,10.03
  pour Top (no thermals): 13.38,12.28 13.38,10.75 arc90 13.48,10.65 14.09,10.65 14.09,11.67 arc-90 14.34,11.92 19.37,11.92 arc90 19.68,12.22 19.68,13.8 14.61,13.8 arc90 14.41,13.6 14.41,13.05 arc-90 14.19,12.83 13.94,12.83 arc90
  pour Top (no thermals): 4.56,13.8 4.56,12.39 arc-90 4.23,12.07 arc90 4.03,11.87 4.03,10.8 arc90 4.18,10.65 4.74,10.65 arc90 4.77,10.68 4.77,11.54 arc-90 5.07,11.84 9.75,11.84 7.63,17.66 7.63,12.75 arc90
  pour Route15: 8.21,20.42 8.21,13.44 arc90 8.34,13.31 21.8,13.31 arc90 22.06,13.56 22.06,20.17 arc90 21.68,20.55 8.34,20.55 arc90
  pour Top (no thermals): 21.15,17.56 19.98,17.56 arc90 19.81,14.94 19.81,17.38 19.81,14.69 arc90 20.03,14.46 arc-90 20.34,14.16 20.34,14.03 arc-90 20.36,14.05 21.41,14.05 arc90 21.43,14.08 21.43,17.28 arc90
  pour Bottom: 9.1,14.6 11.06,14.6 arc-90 11.24,14.43 11.24,13.54 arc-90 11.14,13.44 9.15,13.44 arc-90 9.03,13.56 9.03,14.53 arc-90
  pour Bottom: 21.27,20.39 22.29,20.39 arc-90 22.39,20.29 22.39,18.46 arc-90 22.18,18.26 21.24,18.26 arc-90 21.04,18.46 21.04,20.17 arc-90
  pour Bottom: 19.04,14.48 20.81,14.48 arc-90 21.04,14.25 21.04,13.61 arc-90 20.81,13.38 18.98,13.38 arc-90 18.91,13.46 18.91,14.35 arc-90
  pour Top (no thermals): 20.7,8.78 21.29,8.78 arc90
  pour Top (no thermals): 14.42,13.98 18.87,13.98 arc90 19.81,14.92 19.81,17.38 arc-90 19.98,17.56 21.23,17.56 21.23,9.35 arc-90 21.05,9.18 21.05,9.48 arc90 20.64,9.89 14.45,9.89 14.45,13.95 arc90

## Text on the board
Top: T1
Route2: G2
Route15: P3
Bottom: B4
tPlace: EN | PG | RST | GND | GND | VBAT | VBAT | VBAT | TS | !INT | SDA | SCL | 3V3 | 3V3 | 5VDC | 5VDC | VCC | VCC | CHG | GND | GND | VIN | VIN | REGN
bPlace: ELEKTRA-PMIC v0.2 | 20240223
Reference: 40*27mm
tDocu: NR3015T2R2M